# EAGLE board lightswitchx2 (EAGLE 7.6.0)
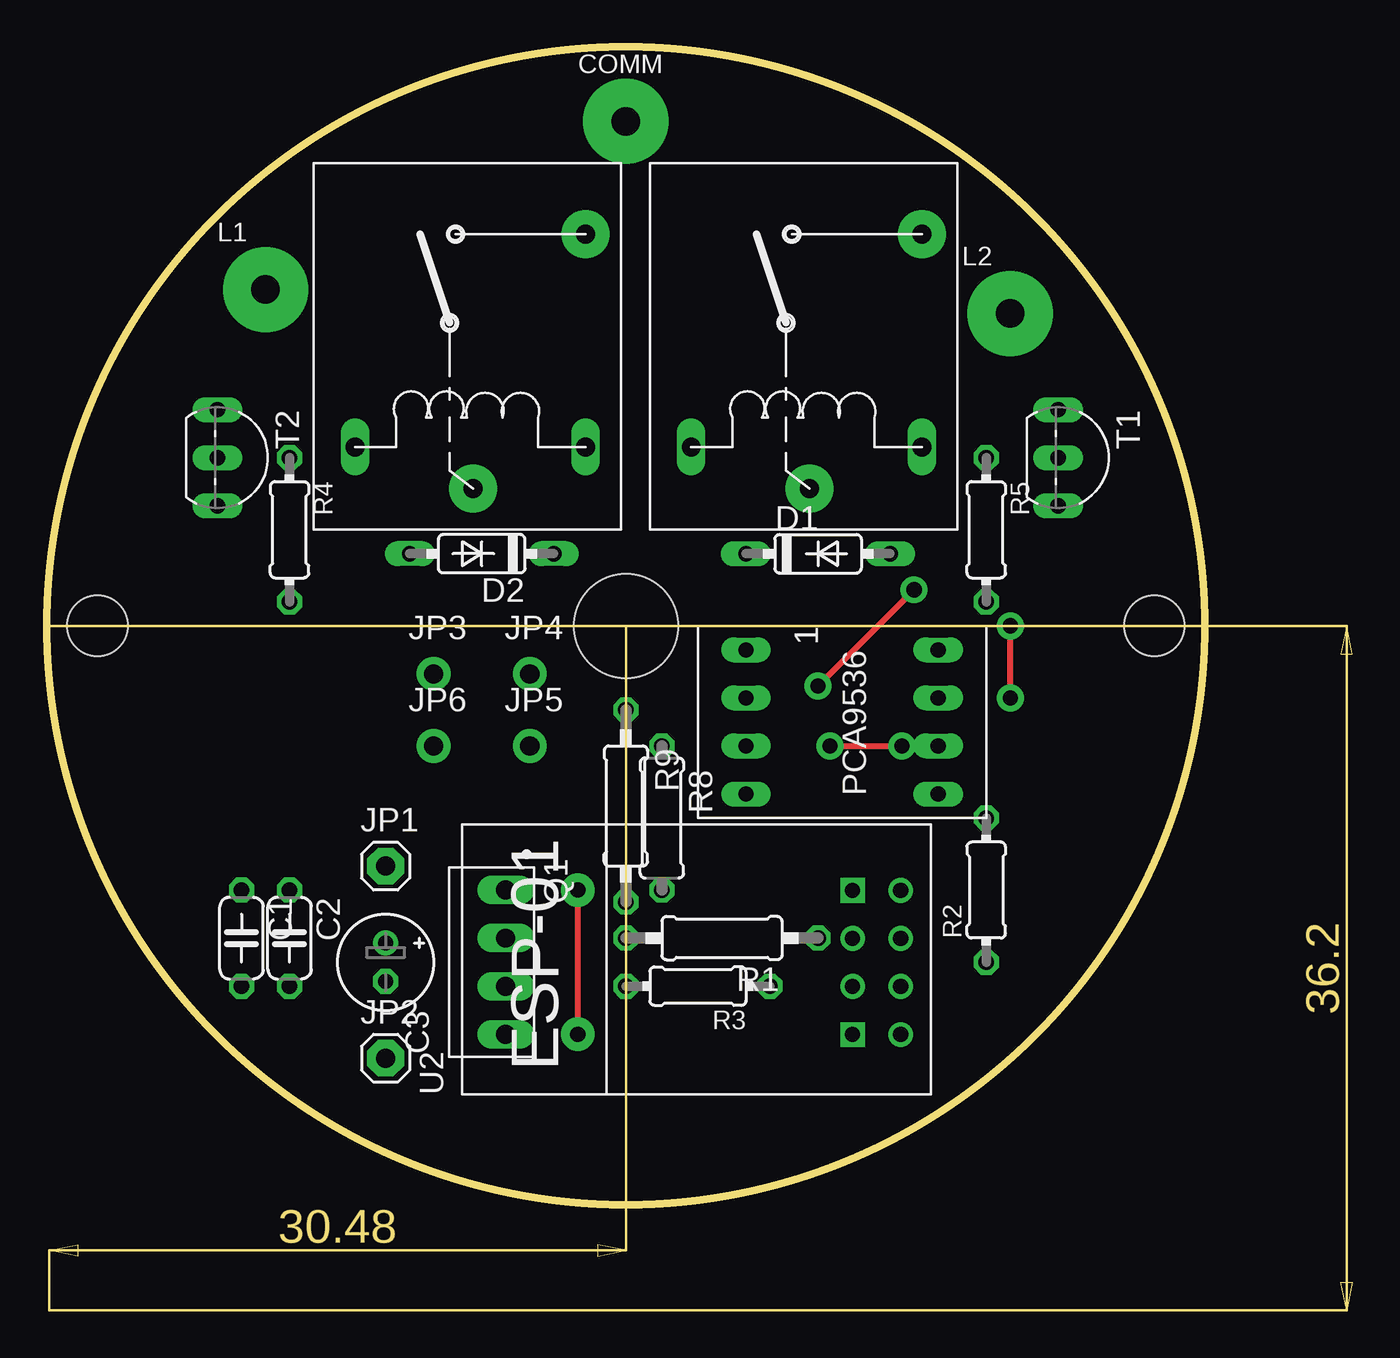
[diagram p0: board, top side]
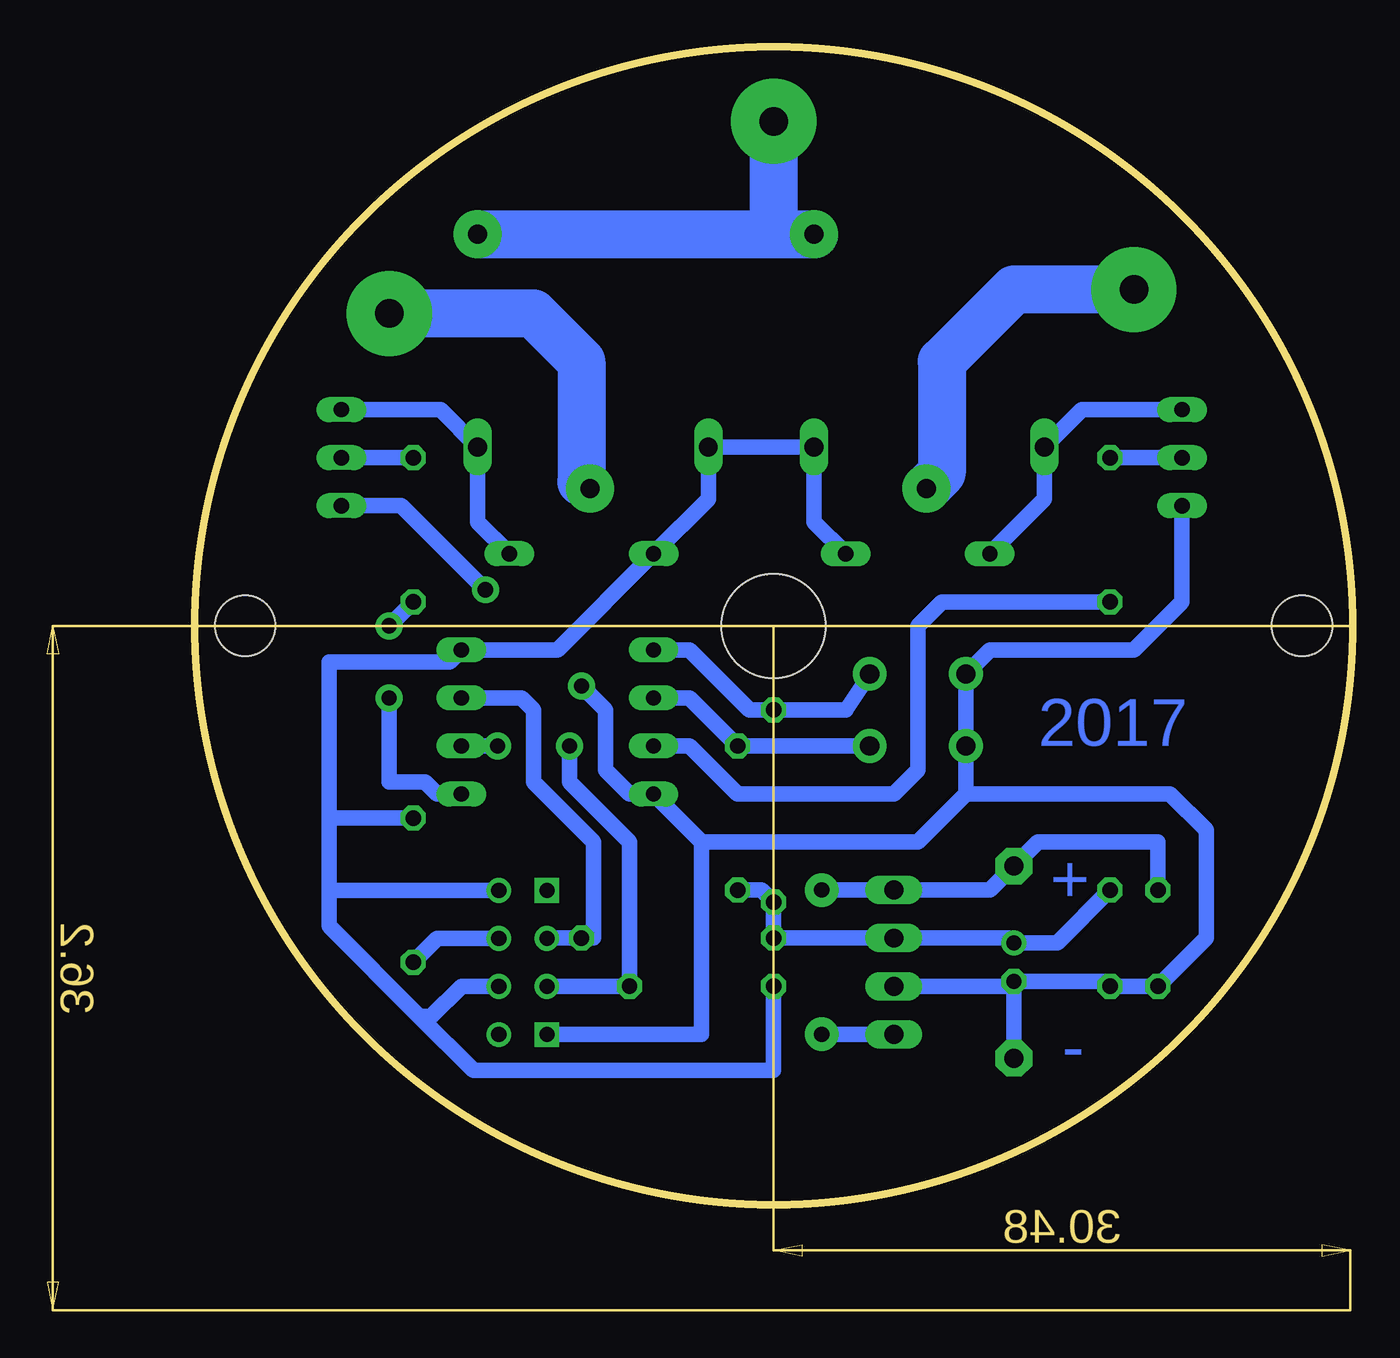
[diagram p1: board, bottom side, seen from below]

Size 61.17 x 61.17 mm. Coordinates in mm from the lower left corner, seen from the top.
Outline: circle at 30.59,30.59 radius 30.59
Copper layers (1*16): Top 0.035mm / dielectric 1.5mm / Bottom 0.035mm
Design rules "default": minimum track width 10mil, minimum drill 24mil, track to track 8mil, track to pad 8mil, pad to pad 8mil, via to via 8mil, smd to smd 8mil, copper to edge 40mil, drill to drill 8mil, minimum pad ring 10mil, minimum via ring 8mil, stop-mask expansion 4mil, vias tented up to drill 0mil, thermal gap 10mil
Holes 5.5 mm at 30.59,30.59
Holes 3.2 mm at 58.53,30.59 2.65,30.59
tKeepout: area 28,28 to 33.1,33.1; 8 lines

## Footprints (pad centres in the part's own frame; a part is rotated, then mirrored left to right if it is on the bottom)
C050-024X044 = drill 0.813 octagon: 1 -2.54,0; 2 2.54,0
E2-5 = drill 0.813 pad 1.27: + -1.016,0 | drill 0.813 pad 1.27 octagon: - 1.016,0
PAD = drill 1.5 pad 4.5: P$1 0,0
DO35-7 = drill 0.813 long: A 3.81,0; C -3.81,0
1X01 = drill 1.016 pad 1.93 octagon: 1 0,0
1X01-CLEANBIG = drill 1.016 pad 1.778: 1 0,0
TO-220-4 = drill 1 long: 1 -3.81,0; 2 -1.27,0; 3 1.27,0; 4 3.81,0
0207/10 = drill 0.813 octagon: 1 -5.08,0; 2 5.08,0
0204/7 = drill 0.813 octagon: 1 -3.81,0; 2 3.81,0
0207/7 = drill 0.813 octagon: 1 -3.81,0; 2 3.81,0
LEG-1A-5 = drill 1 long: L1 2.188,4.375; L2 14.375,4.375 | drill 1 pad 2.54: NO1 8.438,2.188; NO2 14.375,15.625
TO92-EBC = drill 0.813 long: B 0,-1.27; C -2.54,-1.27; E 2.54,-1.27
ADAPTER = drill 0.8 long: P$1 0,0; P$2 2.54,0; P$3 5.08,0; P$4 7.62,0; P$5 7.62,10.16; P$6 5.08,10.16; P$7 2.54,10.16; P$8 0,10.16
ESP01 = drill 0.8: CH_PD -1.285,-8.178; GPIO0 1.255,-5.638; GPIO2 -1.285,-5.638; RST 1.255,-8.178; TX -3.825,-8.178; VCC 3.795,-8.178 | drill 0.8 square: GND -3.825,-5.638; RX 3.795,-5.638

## Placement (x,y rotation side)
C1  100n  [C050-024X044]  10.27,14.08 270 top
C2  100n  [C050-024X044]  12.81,14.08 270 top
C3  330u  [E2-5]  17.89,12.81 270 top
COMM  PAD  [PAD]  30.59,57.26 0 top
D1  1N4148  [DO35-7]  40.75,34.4 0 top
D2  1N4148  [DO35-7]  22.97,34.4 180 top
JP1  +5V  [1X01]  17.89,17.89 0 top
JP2  GND  [1X01]  17.89,7.73 0 top
JP3  SW_GND  [1X01-CLEANBIG]  20.43,28.05 0 top
JP4  SW1  [1X01-CLEANBIG]  25.51,28.05 0 top
JP5  SW2  [1X01-CLEANBIG]  25.51,24.24 0 top
JP6  SW_GND  [1X01-CLEANBIG]  20.43,24.24 0 top
L1  L1  [PAD]  11.54,48.37 0 top
L2  X  [PAD]  50.91,47.1 0 top
Q1  KA78R33CTU  [TO-220-4]  24.24,12.81 270 top
R1  10K  [0207/10]  35.67,14.08 180 top
R2  10K  [0204/7]  49.64,16.62 90 top
R3  10K  [0204/7]  34.4,11.54 180 top
R4  2K2  [0204/7]  12.81,35.67 270 top
R5  2K2  [0204/7]  49.64,35.67 270 top
R8  10K  [0207/7]  32.49,20.43 270 top
R9  10K  [0207/10]  30.59,21.06 270 top
REL1  LEG1A-5  [LEG-1A-5]  14.08,35.67 0 top
REL2  LEG1A-5  [LEG-1A-5]  31.86,35.67 0 top
T1  BC548  [TO92-EBC]  54.72,39.48 270 top
T2  BC548  [TO92-EBC]  10.27,39.48 270 top
U1  PCA9536D  [ADAPTER]  36.94,29.32 270 top
U2  ESP01  [ESP01]  36.94,12.81 90 top

## Library data of the parts
C1-C3 R1-R5 R8 R9 = rcl
COMM L1 L2 REL1 REL2 = LEG-1A-5
D1 D2 = diode
JP1-JP6 = adafruit
Q1 = KA78R33CTU; AVAILABILITY: Good; DESCRIPTION: KA78R Series 3.3 V Fixed Output 1 A LDO Voltage Regulator - TO-220F-4L; MF: Fairchild Semiconductor; MP: KA78R33CTU; PACKAGE: TO-220 Fairchild Semiconductor; PRICE: 0.55 USD
T1 T2 = transistor-npn
U1 = PCA9536D
U2 = esp8266modules

## Nets
N$1: C1.1 JP1.1 Q1.1 Q1.4
N$2: R5.2 U1.P$5
N$3: L1.P$1 REL1.NO1
N$4: R1.1 U1.P$7 U2.GPIO0
N$5: COMM.P$1 REL1.NO2 REL2.NO2
N$6: R3.1 U1.P$6 U2.GPIO2
N$7: R2.1 U2.RST
N$8: R5.1 T1.B
N$9: R4.2 U1.P$3
N$10: R4.1 T2.B
N$11: JP4.1 R9.1 U1.P$1
N$12: L2.P$1 REL2.NO1
N$13: D1.A REL2.L2 T1.C
N$14: JP5.1 R8.1 U1.P$2
N$15: D2.A REL1.L1 T2.C
VDD: C2.1 C3.+ D1.C D2.C Q1.2 R1.2 R2.2 R3.2 R8.2 R9.2 REL1.L2 REL2.L1 U1.P$8 U2.CH_PD U2.VCC
VSS: C1.2 C2.2 C3.- JP2.1 JP3.1 JP6.1 Q1.3 T1.E T2.E U1.P$4 U2.GND

## Tracks (layer width: path | path; a pad name or v marks a point on that pad's centre or on a via)
N$1  (via drill 0.8 pad 1.78)
  Top 0.305: v28.05,9 v28.05,16.62
  Bottom 0.813: Q1.4 v28.05,9 | v28.05,16.62 Q1.1 19.16,16.62 JP1.1 16.62,19.16 10.27,19.16 C1.1
N$2  (via drill 0.8 pad 1.42)
  Top 0.305: v50.91,26.78 v50.91,30.59
  Bottom 0.813: U1.P$5 48.37,21.7 49,22.33 50.91,22.33 v50.91,26.78 | v50.91,30.59 R5.2
N$3
  Bottom 2.54: L1.P$1 17.89,48.37 21.7,44.56 21.7,38.67 REL1.NO1
N$4
  Bottom 0.813: U2.GPIO0 42.56,14.08 R1.1 40.11,14.08 40.11,19.16 43.29,22.33 43.29,26.14 43.92,26.78 U1.P$7
N$5
  Bottom 2.54: REL2.NO2 30.59,51.29 | 30.59,51.29 REL1.NO2 | COMM.P$1 30.59,51.29
N$6  (via drill 0.8 pad 1.42)
  Top 0.305: v41.38,24.24 v45.19,24.24
  Bottom 0.813: U2.GPIO2 42.56,11.54 R3.1 38.21,19.16 41.38,22.33 v41.38,24.24 | v45.19,24.24 U1.P$6
N$7
  Bottom 0.813: U2.RST 48.38,14.06 R2.1
N$8
  Bottom 0.813: R5.1 T1.B
N$9
  Bottom 0.813: U1.P$3 35.03,24.24 32.49,21.7 24.24,21.7 22.97,22.97 22.97,30.59 21.7,31.86 R4.2
N$10
  Bottom 0.813: T2.B R4.1
N$11
  Bottom 0.813: U1.P$1 35.03,29.32 31.86,26.14 R9.1 26.78,26.14 JP4.1
N$12
  Bottom 2.54: REL2.NO1 40.65,38.21 40.75,38.21 40.75,44.56 43.29,47.1 L2.P$1
N$13
  Bottom 0.813: D1.A 46.23,36.07 REL2.L2 48.21,42.02 T1.C
N$14
  Bottom 0.813: U1.P$2 35.03,26.78 R8.1 JP5.1
N$15
  Bottom 0.813: D2.A 16.26,37.29 REL1.L1 14.29,42.02 T2.C
VDD  (1 unrouted)
  Bottom 0.813: D2.C 28.45,36.07 REL1.L2 REL2.L1 34.04,37.29 D1.C 42.02,29.32 U1.P$8 47.73,28.68 54.08,28.68 54.08,20.43 | C2.1 15.6,13.82 C3.+ 18.14,14.08 Q1.2 R1.2 R9.2 31.22,16.62 R8.2 | R3.2 30.59,7.09 46.46,7.09 49.32,9.95 | 49.32,9.95 54.08,14.71 54.08,16.62 | U2.CH_PD 45.13,11.54 47.1,11.54 48.68,9.95 49.32,9.95 | 54.08,16.62 54.08,20.43 | U2.VCC 54.07,16.6 54.08,16.62 | R2.2 54.08,20.43
VSS  (via drill 0.8 pad 1.42)
  Top 0.305: v40.75,27.41 v45.83,32.49
  Bottom 0.813: C3.- 13.06,11.79 C2.2 C1.2 7.73,14.08 7.73,19.79 9.63,21.7 20.43,21.7 | C3.- 18.14,11.54 Q1.3 | JP2.1 C3.- | 20.43,21.7 JP6.1 JP3.1 19.16,29.32 11.54,29.32 9,31.86 T2.E | 34.4,19.16 22.97,19.16 20.43,21.7 | U2.GND 34.41,8.98 34.4,9 34.4,19.16 | T1.E 50.27,36.94 v45.83,32.49 | 34.4,19.16 U1.P$4 38.21,21.7 39.48,22.97 39.48,26.14 v40.75,27.41

## Text on the board
Bottom: 2017 | + | -